# EAGLE board NSL_RFIDShield (EAGLE 5.11)
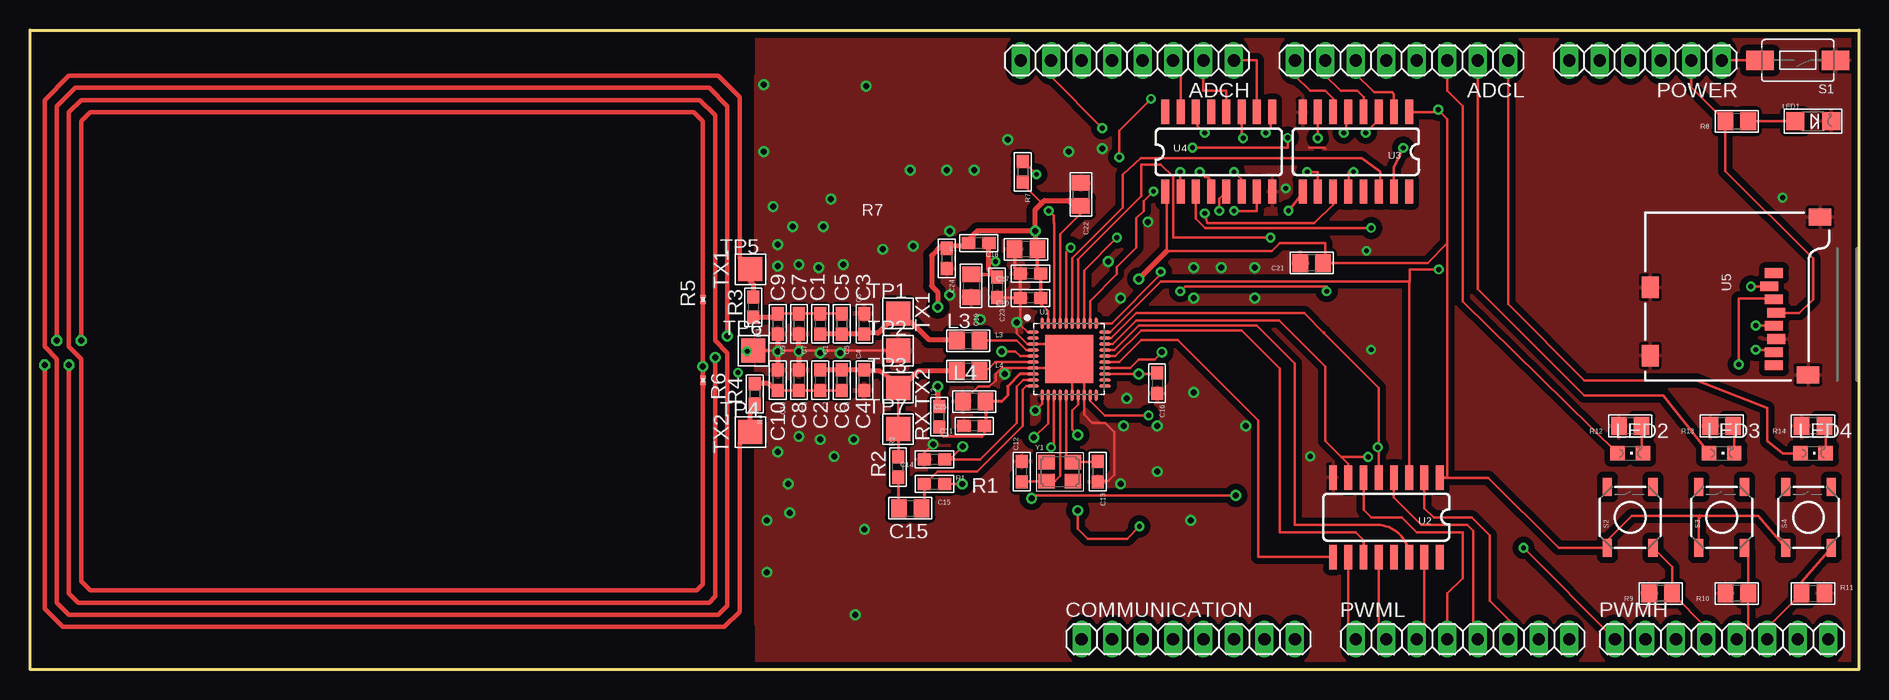
[diagram p0: board, top side]
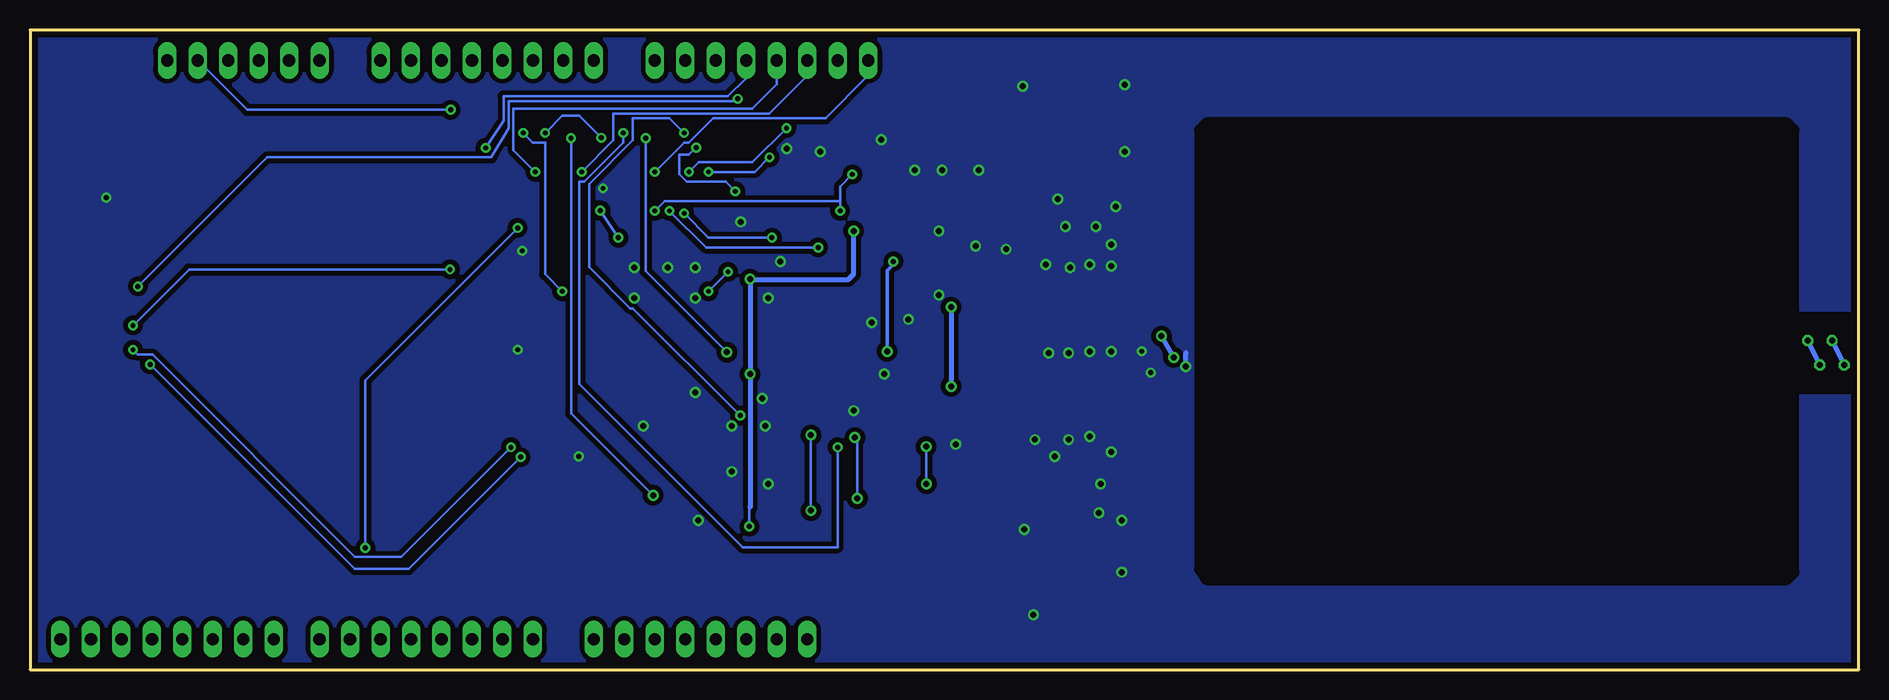
[diagram p1: board, bottom side, seen from below]

Size 152.4 x 53.34 mm. Coordinates in mm from the lower left corner, seen from the top.
Outline: 152.4,0 0,0 0,53.34 152.4,53.34 152.4,0
Copper layers (1*16): Top 0.0356mm / dielectric 1.5011mm / Bottom 0.0356mm
Design rules "SilverCircuits": minimum track width 7mil, minimum drill 14mil, track to track 7mil, track to pad 7mil, pad to pad 7mil, via to via 7mil, smd to smd 0mil, copper to edge 20mil, drill to drill 8mil, minimum pad ring 10mil, minimum via ring 8mil, stop-mask expansion 4mil, vias tented up to drill 0mil, thermal gap 10mil
Net classes: 0 default: width 0.203 mm, drill 0.406 mm, clearance 0.203 mm; 1 power: width 0.61 mm, drill 0.711 mm, clearance 0.203 mm; 2 gnd: width 0.305 mm, drill 0.711 mm, clearance 0.203 mm; 3 usbvcc: width 0.508 mm, drill 0.711 mm, clearance 0.203 mm
tRestrict: area 83.3,28.3 to 83.9,28.4; area 84.3,25.7 to 84.5,26.2; area 86.3,27.9 to 86.8,28.2; area 88.6,25.7 to 88.8,26.2; area 86.1,23.6 to 87.1,23.9
bRestrict: area 5.5,7.6 to 54.8,45.5; area -0.1,28.2 to 5,29.5; area -0.1,23.4 to 5,24.6

## Footprints (pad centres in the part's own frame; a part is rotated, then mirrored left to right if it is on the bottom)
1X08 = drill 1.016 long: 1 -8.89,0; 2 -6.35,0; 3 -3.81,0; 4 -1.27,0; 5 1.27,0; 6 3.81,0; 7 6.35,0; 8 8.89,0
0603@1 = smd 1.1 x 1: 1 -0.85,0; 2 0.85,0
0805 = smd 1.3 x 1.5: 1 -0.95,0; 2 0.95,0
CHIPLED_1206 = smd 1.5 x 1.5: A 0,-1.496; C 0,1.496
CHIPLED_0805 = smd 1.2 x 1.2: A 0,-1.05; C 0,1.05
1X06 = drill 1.016 long: 1 -6.35,0; 2 -3.81,0; 3 -1.27,0; 4 1.27,0; 5 3.81,0; 6 6.35,0
0603 = smd 1.1 x 1: 1 -0.85,0; 2 0.85,0
R0201 = smd 0.28 x 0.43: 1 -0.255,0; 2 0.255,0
TACTILE-SWITCH-1101NE = smd 2.3 x 1.6: P$1 -3.15,0; P$2 3.15,0
TACTILE_SWITCH_SMD = smd 1.524 x 0.762: 1 -2.54,1.905; 2 2.54,1.905; 3 -2.54,-1.905; 4 2.54,-1.905
TESTPOINT_PAD_2MM = smd 2 x 2: P$1 0,0
HVQFN40-6X6 = smd 1 x 0.25: 1 -2.99,2.25; 2 -2.99,1.75; 3 -2.99,1.25; 4 -2.99,0.75; 5 -2.99,0.25; 6 -2.99,-0.25; 7 -2.99,-0.75; 8 -2.99,-1.25; 9 -2.99,-1.75; 10 -2.99,-2.25; 21 2.99,-2.25; 22 2.99,-1.75; 23 2.99,-1.25; 24 2.99,-0.75; 25 2.99,-0.25; 26 2.99,0.25; 27 2.99,0.75; 28 2.99,1.25; 29 2.99,1.75; 30 2.99,2.25 | smd 0.25 x 1: 11 -2.25,-2.99; 12 -1.75,-2.99; 13 -1.25,-2.99; 14 -0.75,-2.99; 15 -0.25,-2.99; 16 0.25,-2.99; 17 0.75,-2.99; 18 1.25,-2.99; 19 1.75,-2.99; 20 2.25,-2.99; 31 2.25,2.99; 32 1.75,2.99; 33 1.25,2.99; 34 0.75,2.99; 35 0.25,2.99; 36 -0.25,2.99; 37 -0.75,2.99; 38 -1.25,2.99; 39 -1.75,2.99; 40 -2.25,2.99 | smd 4 x 4: TP 0,0
SO016 = smd 0.66 x 2.032: 1 -4.445,-3.315; 2 -3.175,-3.315; 3 -1.905,-3.315; 4 -0.635,-3.315; 5 0.635,-3.315; 6 1.905,-3.315; 7 3.175,-3.315; 8 4.445,-3.315; 9 4.445,3.315; 10 3.175,3.315; 11 1.905,3.315; 12 0.635,3.315; 13 -0.635,3.315; 14 -1.905,3.315; 15 -3.175,3.315; 16 -4.445,3.315
MICRO-SD-SOCKET-PP = smd 0.8 x 1.5: 1 -8.94,10.7; 2 -7.84,10.3; 3 -6.74,10.7; 4 -5.64,10.9; 5 -4.54,10.7; 6 -3.44,10.9; 7 -2.34,10.7; 8 -1.24,10.7 | smd 1.8 x 1.4: CD1 -2.05,0.4; CD2 -7.75,0.4 | smd 1.4 x 1.9: GND1 -13.6,14.55; GND3 -0.45,13.55
CRYSTAL_3.2X2.5 = smd 1.4 x 1.2: 1 -1.1,-0.8; 2 1.1,0.8; GND1 -1.1,0.8; GND2 1.1,-0.8

## Placement (x,y rotation side)
ADCH  [1X08]  91.44,50.8 180 top
ADCL  [1X08]  114.3,50.8 180 top
C1  22pF  [0603@1]  65.86,28.83 270 top
C2  22pF  [0603@1]  65.86,24.13 270 top
C3  220pF  [0603@1]  69.54,28.83 90 top
C4  220pF  [0603@1]  69.54,24.13 90 top
C5  NC  [0603@1]  67.63,28.83 270 top
C6  NC  [0603@1]  67.63,24.13 270 top
C7  100pF  [0603@1]  64.08,28.83 270 top
C8  100pF  [0603@1]  64.08,24.13 270 top
C9  NC  [0603@1]  62.3,28.83 270 top
C10  NC  [0603@1]  62.3,24.13 270 top
C11  0.1µF  [0603@1]  78.68,20.32 180 top
C12  18pF  [0603@1]  82.64,16.51 90 top
C13  18pF  [0603@1]  88.99,16.51 270 top
C14  0.1µF  [0603@1]  75.38,17.53 180 top
C15  1000pF  [0805]  73.35,13.46 0 top
C16  0.1µF  [0603@1]  93.92,23.88 270 top
C17  0.1µF  [0603@1]  83.38,33.02 180 top
C18  10µF  [0805]  83,35.05 180 top
C19  10µF  [0805]  78.43,32 270 top
C20  0.1µF  [0603@1]  83.38,30.99 180 top
C21  10µF  [0805]  106.81,33.91 180 top
C22  10µF  [0805]  87.57,39.62 270 top
C23  0.1µF  [0603@1]  80.59,31.88 270 top
C24  0.1µF  [0603@1]  76.4,34.29 270 top
C25  10µF  [0805]  78.68,22.35 180 top
COMMUNICATION  [1X08]  96.52,2.54 0 top
L1  FERRITE  [0603@1]  79.06,35.56 180 top
L2  FERRITE  [0603@1]  75.76,21.08 90 top
L3  560nH  [0805]  78.18,27.43 0 top
L4  560nH  [0805]  78.18,24.89 0 top
LED1  [CHIPLED_1206]  148.59,45.72 270 top
LED2  [CHIPLED_0805]  133.35,18.03 270 top
LED3  [CHIPLED_0805]  140.97,18.03 270 top
LED4  [CHIPLED_0805]  148.59,18.03 270 top
POWER  [1X06]  134.62,50.8 180 top
PWMH  [1X08]  140.97,2.54 0 top
PWML  [1X08]  119.38,2.54 0 top
R1  1.0K  [0603]  75.38,15.49 0 top
R2  1.69K  [0603]  72.33,16.89 90 top
R3  1.5  [0603]  60.27,30.23 270 top
R4  1.5  [0603]  60.4,22.99 270 top
R5  NC  [R0201]  56.08,30.86 90 top
R6  NC  [R0201]  56.08,24.13 270 top
R7  10K  [0603]  82.72,41.5 270 top
R8  [0805]  142.24,45.72 180 top
R9  [0805]  135.89,6.35 180 top
R10  [0805]  142.24,6.35 180 top
R11  [0805]  148.59,6.35 0 top
R12  [0805]  133.35,20.32 180 top
R13  [0805]  140.97,20.32 180 top
R14  [0805]  148.59,20.32 180 top
S1  reset  [TACTILE-SWITCH-1101NE]  147.32,50.8 180 top
S2  [TACTILE_SWITCH_SMD]  133.35,12.7 90 top
S3  [TACTILE_SWITCH_SMD]  140.97,12.7 90 top
S4  [TACTILE_SWITCH_SMD]  148.21,12.7 90 top
TP1  TX1_POST  [TESTPOINT_PAD_2MM]  72.33,29.7 0 top
TP2  TGND  [TESTPOINT_PAD_2MM]  72.33,26.6 0 top
TP3  TX2_POST  [TESTPOINT_PAD_2MM]  72.33,23.49 0 top
TP4  TX2_PRE  [TESTPOINT_PAD_2MM]  60.02,19.81 0 top
TP5  TX1_PRE  [TESTPOINT_PAD_2MM]  60.02,33.38 0 top
TP6  TGND  [TESTPOINT_PAD_2MM]  60.28,26.6 0 top
TP7  RX  [TESTPOINT_PAD_2MM]  72.33,20.07 0 top
U1  PN532  [HVQFN40-6X6]  86.59,25.89 0 top
U2  HEX_CONVERTER  [SO016]  113.03,12.7 180 top
U3  HEX_CONVERTER  [SO016]  110.49,43.18 180 top
U4  HEX_CONVERTER  [SO016]  99.06,43.18 0 top
U5  USD-SOCKETNEW  [MICRO-SD-SOCKET-PP]  134.62,24.13 270 top
Y1  27.12MHz  [CRYSTAL_3.2X2.5]  85.81,16.51 0 top

## Library data of the parts
ADCH ADCL COMMUNICATION POWER PWMH PWML = pinhead
C1-C25 L1-L4 LED1 R1-R4 R7-R14 TP1-TP7 U1 Y1 = microbuilder
LED2-LED4 = led
R5 R6 = rcl
S1-S4 U2-U5 = SparkFun

## Nets
+5V [usbvcc]: POWER.3
_AUX1: ADCL.8 U3.6
_AUX2: ADCH.1 U4.10
_IRQ: PWML.1 U2.10
_MISO: PWML.5 U2.4
_MOSI/SDA/TX: PWML.4 U2.6
_NSS/SCL/RX: PWML.3 U2.15
_P30/UART_RX: ADCH.2 U4.12
_P31: ADCL.6 U3.2
_P32: ADCL.7 U3.4
_P33: ADCH.5 U3.12
_P34/SIC_CLK: ADCH.6 U3.10
_P35: ADCH.3 U4.15
_RSTOUT_N: PWML.2 U2.12
_RSTPD_N: ADCH.8 U4.6
_SCK: PWML.6 U2.2
_SD_CS: PWMH.1 U4.3
_SIGIN: ADCH.7 U4.4
_SIGOUT: ADCH.4 U3.15
AUX1: U1.12 U3.7
AUX2: U1.13 U4.9
GND: C3.2 C4.1 C7.2 C8.1 C9.2 C10.1 C11.2 C12.2 C13.2 C14.2 C16.2 C17.2 C18.2 C19.2 C20.2 C21.2 C22.1 C23.2 C24.2 C25.2 LED1.C R5.2 R6.1 R9.2 R10.2 R11.2 R12.2 R13.2 R14.2 S1.P$1 TP2.P$1 TP6.P$1 U1.1 U1.3 U1.7 U1.11 U1.16 U1.18 U1.TP U2.8 U3.8 U4.8 U5.6 U5.CD1 U5.CD2 U5.GND1 U5.GND3
IRQ: U1.25 U2.9
L1: ADCL.3 LED2.A
L2: ADCL.2 LED3.A
L3: ADCL.1 LED4.A
MISO: U1.29 U2.5 U5.7
MOSI/SDA/TX: U1.28 U2.7 U5.3
N$1: L3.2 U1.4
N$2: L4.2 U1.6
N$3: C1.2 C3.1 C5.2 L3.1 TP1.P$1
N$4: R3.1 R6.2 TP5.P$1
N$5: R4.2 R5.1 TP4.P$1
N$7: C12.1 U1.14 Y1.1
N$8: C13.1 U1.15 Y1.2
N$9: C15.1 R2.1
N$10: C14.1 R1.2 U1.9
N$11: C15.2 R1.1 U1.10
N$12: C2.1 C4.2 C6.1 L4.1 R2.2 TP3.P$1 TP7.P$1
N$13: C11.1 C25.1 L2.1 U1.8
N$14: C19.1 C23.1 L1.1 U1.5
N$17: ADCL.4
N$18: LED1.A R8.1
N$20: PWML.7
N$21: PWML.8
N$22: ADCL.5
N$23: U5.8
N$25: LED2.C R12.1
N$26: LED3.C R13.1
N$27: LED4.C R14.1
NSS/SCL/RX: U1.27 U2.14
P30/UART_RX: U1.24 U4.11
P31: U1.31 U3.3
P32: U1.32 U3.5
P33: U1.33 U3.11
P34/SIC_CLK: U1.34 U3.9
P35: U1.19 U4.14
RESET: POWER.1 S1.P$2
RSTOUT_N: U1.26 U2.11
RSTPD_N: R7.1 U1.38 U4.7
S2: PWMH.4 R9.1 S2.3
S3: PWMH.5 R10.1 S3.3
S4: PWMH.6 R11.1 S4.3
SCK: U1.30 U2.3 U5.5
SD_CS: U4.2 U5.2
SIGIN: U1.36 U4.5
SIGOUT: U1.35 U3.14
TX1_ANTENNA: C1.1 C5.1 C7.1 C9.1 R3.2
TX2_ANTENNA: C2.2 C6.2 C8.2 C10.2 R4.1
VDD: C16.1 C17.1 C18.1 C20.1 C21.1 C22.2 C24.1 L1.2 L2.2 POWER.2 R7.2 R8.2 S2.1 S3.1 S4.1 U1.17 U1.23 U1.37 U1.39 U1.40 U2.1 U3.1 U4.1 U5.4
VIN [power]: POWER.6

## Tracks (layer width: path | path; a pad name or v marks a point on that pad's centre or on a via)
_AUX1
  Top 0.203: U3.6 108.58,47.62 107.95,48.26 106.68,48.26 105.41,49.53 ADCL.8
_AUX2
  Top 0.203: U4.10 102.24,50.8 ADCH.1
_IRQ
  Top 0.203: U2.10 109.86,2.54 PWML.1
_MISO
  Top 0.203: U2.4 113.67,14.35 115.95,12.06 119.76,12.06 120.27,11.56 120.27,2.92 PWML.5
_MOSI/SDA/TX
  Top 0.203: U2.6 111.12,13.33 111.76,12.7 114.3,12.7 115.57,11.43 119.38,11.43 119.38,7.62 118.11,6.35 PWML.4
_NSS/SCL/RX
  Top 0.203: U2.15 116.2,2.54 PWML.3
_P30/UART_RX
  Top 0.203: U4.12 99.69,48.26 97.79,48.26 ADCH.2
_P31
  Top 0.203: ADCL.6 110.49,49.66 112.01,48.13 113.54,48.13 113.67,48.01 U3.2
_P32
  Top 0.203: ADCL.7 107.95,49.53 109.22,48.26 110.62,48.26 111.12,47.75 U3.4
_P33  (via drill 0.41)
  Top 0.203: U3.12 109.88,39.88 109.88,41.5 v110.29,41.5
  Bottom 0.203: v110.29,41.5 112.12,43.33 112.12,46.79 92.2,46.79 90.17,48.82 ADCH.5
_P34/SIC_CLK  (via drill 0.41)
  Top 0.203: 107.24,39.88 U3.10 107.31,41.5 v106.43,41.5
  Bottom 0.203: v106.43,41.5 103.78,44.14 103.78,46.38 90.78,46.38 87.73,49.43 87.73,50.65 ADCH.6
_P35
  Top 0.203: U4.15 95.88,50.8 ADCH.3
_RSTOUT_N
  Top 0.203: U2.12 112.39,2.54 PWML.2
_RSTPD_N  (via drill 0.41)
  Top 0.203: U4.6 100.94,39.88 100.94,40.89 v100.33,41.5
  Bottom 0.203: v100.33,41.5 97.89,43.94 97.49,43.94 95.45,45.97 86.11,45.97 82.65,49.43 82.65,50.65 ADCH.8
_SCK
  Top 0.203: U2.2 116.2,13.46 116.97,12.7 120.14,12.7 121.67,11.18 121.67,5.72 123.32,4.06 123.32,2.67 PWML.6
_SD_CS  (via drill 0.41)
  Top 0.203: v124.46,10.16 PWMH.1 | v111.76,36.83 97.92,36.83 97.15,37.59 U4.3
  Bottom 0.203: v124.46,10.16 124.46,24.13 v111.76,36.83
_SIGIN  (via drill 0.41)
  Top 0.203: v97.49,41.5 97.89,41.1 arc-90 98.43,40.56 U4.4 | v89.36,45.16 85.09,49.43 ADCH.7
  Bottom 0.203: v97.49,41.5 96.67,42.32 92.2,42.32 v89.36,45.16
_SIGOUT  (via drill 0.41)
  Top 0.203: U3.15 113.67,41.86 v114.43,43.51
  Bottom 0.203: v114.43,43.51 112.93,45.77 112.93,47.8 94.23,47.8 92.81,49.23 92.81,50.65 ADCH.4
AUX1  (via drill 0.41, 0.5)
  Top 0.203: v100.47,14.54 83.72,14.54 v83.46,14.27 | 83.87,19.56 v83.66,19.36 84.84,20.53 U1.12 | U3.7 v107.31,44.32
  Bottom 0.203: 100.53,14.48 v100.47,14.54 107.31,21.38 v107.31,44.32 | v83.46,14.27 83.46,19.15 v83.66,19.36
AUX2  (via drill 0.41)
  Top 0.203: v85.09,18.54 85.29,18.75 85.29,22.81 U1.13 | v102.97,44.76 103.38,45.16 103.38,46.38 U4.9
  Bottom 0.203: v85.09,18.54 85.09,10.21 93.01,10.21 106.63,23.83 106.63,40.69 106.22,40.69 102.97,43.94 v102.97,44.76
GND  (via drill 0.4, 0.41, 0.5)
  Top 0.203: U1.1 83.13,28.14 82.53,28.74 C20.2 | C13.2 89.33,15.75 89.86,15.75 90.37,16.26 90.37,19.81 89.61,20.57 88.54,20.57 87.84,21.27 U1.18 87.84,24.64 87.36,25.12 | 87.36,25.12 U1.TP | TP6.P$1 64.08,26.6 TP2.P$1 | U1.11 84.34,22.17 v83.76,21.59 | 85.54,25.15 85.54,25.14 U1.7 80.98,25.14 80.97,25.15 80.46,24.64 80.46,24.13 79.95,23.62 79,23.62 C25.2 | 84.78,27.69 85.03,27.69 85.03,27.18 arc-90 85,27.14 U1.3 83.12,27.14 82.24,28.02 v82.24,28.96 | v75.25,18.8 74.24,17.82 C14.2 | 86.87,24.38 86.84,24.36 U1.16 86.84,24.61 87.36,25.12 | 106.61,43.52 106.63,43.54 107.85,43.54 107.94,43.43
  Top 0.254: 82.05,33.5 C17.2 | C23.2 80.63,30.99 C20.2
  Top 0.305: C17.2 C20.2 | C18.2 82.05,33.5
  Top 0.356: R5.2 v56.08,25.27 R6.1
  Top 0.406: C8.1 64.08,26.6 C7.2 | C9.2 C10.1 | R6.1 56.08,23.5
  Bottom 0.406: v56.08,25.27 56.08,26.42
  other vias: 61.92,38.61 63.32,13.08 67,17.78 64.08,33.78 65.73,33.53 62.3,33.66 63.19,15.49 62.3,18.16 68.65,19.18 65.86,19.18 59.76,26.54 62.3,26.54 64.08,26.54 65.86,26.42 67.51,26.42 59,24.77 67.76,33.78 62.3,35.43 63.57,36.96 66.75,39.24 66.11,36.96 64.08,19.43 93.92,20.32 91.38,22.61 96.97,23.11 90.88,15.49 81.22,24.64 79.19,29.21 71.06,35.05 73.35,41.66 76.4,41.66 78.68,41.66 81.48,44.2 86.56,43.18 89.35,43.43 93.16,37.34 89.86,34.04 101.31,20.32 102.05,30.99 96.97,30.99 96.97,33.53 99.26,33.53 102.05,33.53 93.92,16.51 96.72,12.45 76.65,31.24 76.65,36.58 73.6,35.31 61.16,43.18 61.16,48.77 61.41,12.45 61.41,8.13 68.78,4.57 69.54,11.68 69.67,48.64 90.88,30.99 91.13,20.32 146.05,39.37 111.76,26.67 106.68,17.78 111.38,34.92 104.65,40.13
  pour Top (isolate 0.406): 60.52,49.53 70.56,49.53 70.56,3.81 60.52,3.81
  pour Top (isolate 0.406): 70.81,27.94 74.11,27.94 74.11,24.89 70.81,24.89
  pour Bottom (isolate 0.406): -0.56,0.51 152.6,0.51 152.6,52.83 -0.56,52.83
  pour Top (isolate 0.508, rank 2): 153.03,0.64 60.58,0.64 60.58,52.7 153.03,52.7
IRQ
  Top 0.203: 90.17,25.64 90.56,25.64 | 90.17,25.64 U1.25 | 90.17,25.64 90.17,25.65 90.78,25.65 92.61,27.48 95.66,27.48 102.36,20.78 102.36,9.39 U2.9
L1
  Top 0.203: LED2.A 119.38,30.7 119.38,46.99 118.11,48.26 ADCL.3
L2
  Top 0.203: LED3.A 136.11,22.86 129.54,22.86 120.65,31.75 ADCL.2
L3
  Top 0.203: ADCL.1 123.19,30.48 129.54,24.13 138.9,24.13 144.78,21.81 144.78,19.05 146.05,18.03 LED4.A
MISO  (via drill 0.41)
  Top 0.203: U1.29 90.12,27.64 92.2,29.72 106.17,29.72 107.82,28.07 | 107.82,28.07 107.85,28.09 | 107.82,28.07 112.39,23.5 112.39,18.54 | 112.39,18.54 U2.5 | v143.81,26.67 145.24,26.67 U5.7 | v112.32,18.54 112.39,18.54
  Bottom 0.203: v143.81,26.67 143.41,26.26 142.19,26.26 125.32,9.4 121.46,9.4 v112.32,18.54
MOSI/SDA/TX  (via drill 0.41)
  Top 0.203: U1.28 90.23,27.14 92.2,29.11 104.12,29.11 107.95,25.27 107.95,19.05 109.27,17.73 | 109.27,17.73 109.86,17.14 U2.7 | v142.39,25.45 142.39,30.94 145.24,30.94 U5.3 | v111.51,17.73 109.27,17.73
  Bottom 0.203: v142.39,25.45 125.32,8.38 120.85,8.38 v111.51,17.73
N$1
  Top 0.203: U1.4 83.03,26.64 82.24,27.43 L3.2
N$2
  Top 0.203: U1.6 80.45,25.64 79.7,24.89 L4.2
N$3
  Top 0.203: C1.2 C5.2 | L3.1 77.16,27.5 | 71.78,29.17 72.33,29.17 72.33,29.08
  Top 0.406: TP1.P$1 71.78,29.66 71.78,29.17 70.68,28.07 69.63,28.07 C3.1 C1.2 | 77.16,27.5 74.94,27.5 73.48,28.96 72.46,28.96 72.33,29.08
N$4
  Top 0.356: TP5.P$1 59.13,34.27 59.13,47.74 57.35,49.53 3.25,49.53 1.21,47.5 1.21,26.92 2.23,25.91 2.23,5.59 3.25,4.57 57.35,4.57 58.11,5.33 58.11,26.42 57.09,27.43 57.09,46.23 55.82,47.5 4.26,47.5 3.25,46.48 3.25,26.92 4.26,25.91 4.26,7.37 5.02,6.6 55.57,6.6 56.08,7.11 R6.2
  Top 0.406: R3.1 60.27,32.13 59.76,32.64 59.76,33.38 TP5.P$1
N$5  (via drill 0.5)
  Top 0.356: v1.21,25.4 1.21,5.08 2.74,3.56 57.86,3.56 59.13,4.83 59.13,18.92 TP4.P$1 | v2.23,27.43 2.23,46.99 3.75,48.51 56.59,48.51 58.11,46.99 v58.11,27.81 | v57.09,26.03 57.09,6.1 56.59,5.59 4.01,5.59 3.25,6.35 v3.25,25.4 | v4.26,27.43 4.26,45.72 5.02,46.48 55.32,46.48 56.08,45.72 R5.1 56.08,30.48
  Top 0.406: R4.2 60.4,21.84 60.01,21.46 TP4.P$1
  Bottom 0.406: v2.23,27.43 v1.21,25.4 | v58.11,27.81 v57.09,26.03 | v3.25,25.4 v4.26,27.43
N$7
  Top 0.203: C12.1 82.43,15.71 Y1.1 84.75,15.75 85.43,15.75 85.84,16.16 U1.14
N$8
  Top 0.203: C13.1 89.19,17.31 Y1.2 86.34,17.88 U1.15
N$9
  Top 0.254: R2.1 72.33,13.53 C15.1
N$10  (via drill 0.5)
  Top 0.203: U1.9 82.76,24.14 82.24,23.62 82.24,20.57 79.19,17.53 C14.1 76.65,17.53 v77.72,18.59 | v77.69,15.49 R1.2
  Bottom 0.203: v77.72,18.59 77.72,15.52 v77.69,15.49
N$11
  Top 0.203: U1.10 83.02,23.64 82.75,23.37 82.75,20.32 78.94,16.51 75.64,16.51 74.62,15.49 R1.1
  Top 0.254: C15.2 74.53,13.69 R1.1
N$12
  Top 0.203: L4.1 77.16,24.83 | TP3.P$1 TP7.P$1
  Top 0.254: TP7.P$1 R2.2
  Top 0.406: C2.1 C6.1 C4.2 69.37,24.89 70.81,24.89 72.33,23.88 TP3.P$1 72.84,24 73.1,24 73.99,24.89 L4.1
N$13
  Top 0.203: 75.76,19.81 L2.1
  Top 0.254: U1.8 82.5,24.64 81.48,23.62 81.48,22.86 80.97,22.35 C25.1 79.63,20.67 C11.1 79.53,19.65 79.32,19.43 76.14,19.43 75.76,19.81
N$14  (via drill 0.41, 0.5)
  Top 0.203: U1.5 82.52,26.14 82.11,26.54 v80.97,26.54
  Top 0.305: C23.1 80.31,32.95 C19.1 | 79.92,34.04 v80.46,34.04
  Top 0.406: 80.31,32.95 79.92,33.35 79.92,34.04 L1.1
  Bottom 0.305: v80.97,26.54 80.97,33.27 80.46,33.78 v80.46,34.04
N$18
  Top 0.203: R8.1 LED1.A
N$25
  Top 0.203: LED2.C 134.3,17.88 R12.1
N$26
  Top 0.203: LED3.C 142.02,20.22 R13.1
N$27
  Top 0.203: LED4.C 149.64,20.22 R14.1
NSS/SCL/RX
  Top 0.203: U1.27 90.34,26.64 92.4,28.7 102.24,28.7 105.41,25.53 105.41,12.06 112.25,12.06 arc-90 U2.14
P30/UART_RX  (via drill 0.41, 0.5)
  Top 0.203: U1.24 91.68,25.14 92.4,25.86 93.72,25.86 v94.33,26.47 | v101.09,44.32 100.96,44.45 U4.11
  Bottom 0.203: v94.33,26.47 101.09,33.23 v101.09,44.32
P31  (via drill 0.41)
  Top 0.203: v94.23,33.17 94.23,32.97 90.14,28.88 U1.31 | v95.86,31.55 96.27,31.95 108.05,31.95 v108.05,31.55 | v111.3,44.76 112.32,45.77 112.32,46.38 U3.3
  Bottom 0.203: v95.86,31.55 v94.23,33.17 | v108.05,31.55 109.47,32.97 109.47,43.94 110.49,43.94 v111.3,44.76
P32  (via drill 0.41)
  Top 0.203: 88.34,30.73 88.34,30.74 | 88.34,30.73 U1.32 | v93.62,39.88 92.81,39.07 92.81,38.25 92.2,37.64 92.2,35.2 90.58,33.58 90.58,32.97 88.34,30.73 | v96.88,43.54 104.8,43.54 v104.8,44.35 | v109.47,44.76 109.68,44.96 109.68,46.38 U3.5
  Bottom 0.203: v93.62,39.88 94.44,40.69 97.69,40.69 98.3,41.3 98.3,42.93 97.49,42.93 v96.88,43.54 | v104.8,44.35 106.63,46.18 108.05,46.18 v109.47,44.76
P33  (via drill 0.41)
  Top 0.203: U1.33 87.84,33.28 v90.58,36.02 | v97.89,38.05 98.09,37.24 107.04,37.24 108.58,38.79 U3.11
  Bottom 0.203: v97.89,38.05 95.86,36.02 v90.58,36.02
P34/SIC_CLK  (via drill 0.41)
  Top 0.203: v104.88,38.28 106.02,39.67 U3.9 | v103.38,36.02 95.25,36.02 95.25,41.1 94.23,42.11 92.61,42.11 92.61,39.47 87.32,34.19 87.34,34.17 U1.34
  Bottom 0.203: v104.88,38.28 v103.38,36.02
P35  (via drill 0.41)
  Top 0.203: v93.22,21.18 89.56,21.18 88.34,22.4 88.34,22.81 U1.19 | v97.89,44.76 97.28,45.36 97.28,46.38 U4.14
  Bottom 0.203: v93.22,21.18 102.16,30.12 102.36,30.12 105.82,33.58 105.82,40.49 102.16,44.14 102.16,45.97 99.11,45.97 v97.89,44.76
RESET
  Top 0.203: S1.P$2 POWER.1
RSTOUT_N
  Top 0.203: U1.26 90.45,26.14 92.6,28.3 100.96,28.3 104.14,25.12 104.14,11.43 110.49,11.43 111.12,10.8 U2.11
RSTPD_N  (via drill 0.41)
  Top 0.203: 85.34,37.24 85.34,37.29 | 85.34,37.24 U1.38 | 82.55,42.52 R7.1 82.86,42.32 v83.87,41.3 | v84.89,38.25 85.29,37.85 85.29,37.24 85.34,37.24 | 102.16,39.67 U4.7 102.24,38.25 v100.33,38.25
  Bottom 0.203: v83.87,41.3 84.89,40.28 84.89,39.07 | 84.89,39.07 v84.89,38.25 | v100.33,38.25 99.52,39.07 84.89,39.07
S2
  Top 0.203: PWMH.4 139.7,3.49 R9.1 136.84,8.58 S2.3
S3
  Top 0.203: PWMH.5 143.19,3.49 R10.1 143.19,9.84 S3.3
S4
  Top 0.203: PWMH.6 144.78,3.49 R11.1 147.64,7.3 S4.3
SCK  (via drill 0.41)
  Top 0.203: U1.30 90.01,28.14 94.23,32.36 114.94,32.36 | 114.94,32.36 U2.3 | v143.81,28.7 145.24,28.7 U5.5 | v117.4,33.38 114.96,33.38 114.96,32.36 114.94,32.36
  Bottom 0.203: v143.81,28.7 139.14,33.38 v117.4,33.38
SD_CS  (via drill 0.41)
  Top 0.203: v143.41,31.95 144.83,31.95 U5.2 | v93.42,47.6 90.78,44.96 v90.78,42.72 | 95.86,39.88 95.66,40.08 | v95.86,41.5 95.86,39.88 | 95.86,39.88 U4.2
  Bottom 0.203: v93.42,47.6 93.62,47.4 112.52,47.4 112.52,45.16 113.96,42.73 113.94,42.72 132.64,42.72 v143.41,31.95 | v90.78,42.72 92,41.5 v95.86,41.5
SIGIN  (via drill 0.41)
  Top 0.203: v99.11,38.25 99.11,39.27 99.52,39.67 U4.5 | U1.36 86.34,34.83 v86.72,35.2
  Bottom 0.203: v99.11,38.25 96.06,35.2 v86.72,35.2
SIGOUT
  Top 0.203: U1.35 86.84,34.32 91.06,38.54 91.06,41.27 92.58,42.67 111,42.67 112.52,41.53 112.52,39.99 U3.14
TX1_ANTENNA
  Top 0.203: C9.1 C7.1 C1.1 C5.1
  Top 0.406: R3.2 62,29.38 C9.1
TX2_ANTENNA
  Top 0.203: C10.2 C8.2 C2.2 C6.2
  Top 0.406: C10.2 62.13,23.28 61.54,23.88 60.69,23.88 R4.1
VDD  (via drill 0.41, 0.5)
  Top 0.203: C16.1 93.84,24.64 v92.4,24.64 U1.23 | C22.2 86.9,38.67 | 87.52,38.62 C22.2 | U1.40 U1.39 84.84,29.91 84.23,30.52 | 83.95,33.3 C17.1 | v87.32,19.56 86.84,20.04 86.84,21.59 87.34,22.09 U1.17 | v92.46,11.94 91.44,10.92 88.14,10.92 87.32,11.74 v87.32,13.26 | U1.37 85.84,36.31 87.63,38.1 87.63,38.62 C22.2 | R7.2 82.72,40.47 84.3,38.89 | R8.2 140.97,45.72 | POWER.2 138.43,48.58 R8.2 | R8.2 141.29,41.59 148.59,34.29 148.59,30.86 147.45,29.72 145.57,29.72 U5.4 | U4.1 94.74,39.74 94.74,34.9 103.48,34.9 104.14,35.56 107.95,35.56 107.95,34.1 C21.1 116.46,33.91 118.11,35.56 | S4.1 144.02,12.83 139.14,12.83 | 139.14,12.83 133.48,12.83 131.44,10.8 S2.1 127.38,10.16 121.54,16 117.49,16 U2.1 118.11,16.02 118.11,35.56 | 139.06,12.65 139.06,12.7 | 139.06,12.65 S3.1 | 139.14,12.83 139.14,12.65 139.06,12.65 | 139.14,12.83 139.14,12.85 | U3.1 117.16,46.49 v117.35,46.68 118.11,45.92 118.11,35.56
  Top 0.254: 87.05,38.62 87.52,38.62
  Top 0.305: C17.1 C20.1 | 84.23,30.96 84.23,30.52 | C18.1 83.95,33.3
  Top 0.406: 94.74,34.9 v92.4,32.56 | v83.76,36.58 83.76,35.05 C18.1 | v83.76,36.58 78.94,36.58 78.21,35.85 L1.2 78.21,35.31 76.4,35.31 | L2.2 75.64,22.57 v75.64,23.62 | 76.4,35.31 75.89,35.31 75.13,34.54 75.13,32 75.64,31.5 v75.64,30.23 | 76.4,35.31 C24.1 | 87.05,38.62 86.56,39.12 84.53,39.12 84.3,38.89 83.76,38.35 v83.76,36.58 | C20.1 84.23,30.96
  Bottom 0.203: v87.32,13.26 v87.32,19.56 | v92.46,11.94 92.46,13.47 92.4,13.53 | 138.33,50.65 POWER.2 134.31,46.68 v117.35,46.68
  Bottom 0.406: 92.4,13.53 v92.4,24.64 v92.4,32.56 92.35,32.51 84.23,32.51 83.76,32.98 v83.76,36.58 | v75.64,30.23 v75.64,23.62

## Text on the board
tPlace: R7 | TX1 | C9 | C7 | C1 | C5 | C3 | R3 | L3 | TX1 | L4 | R4 | TX2 | C8 | C2 | C6 | C4 | C10 | RX | TX2 | R2 | R1 | C15